# Altium PCB control plate ( mill right).pcbdoc
Units mil, origin at the board's own origin, x right, y up, seen from the top; angles counter-clockwise.
Board outline 8867.98 x 9458.85 mil, 2 copper layers (Top Layer, Bottom Layer); 4 components, 0 nets, 8 pads, 0 vias.
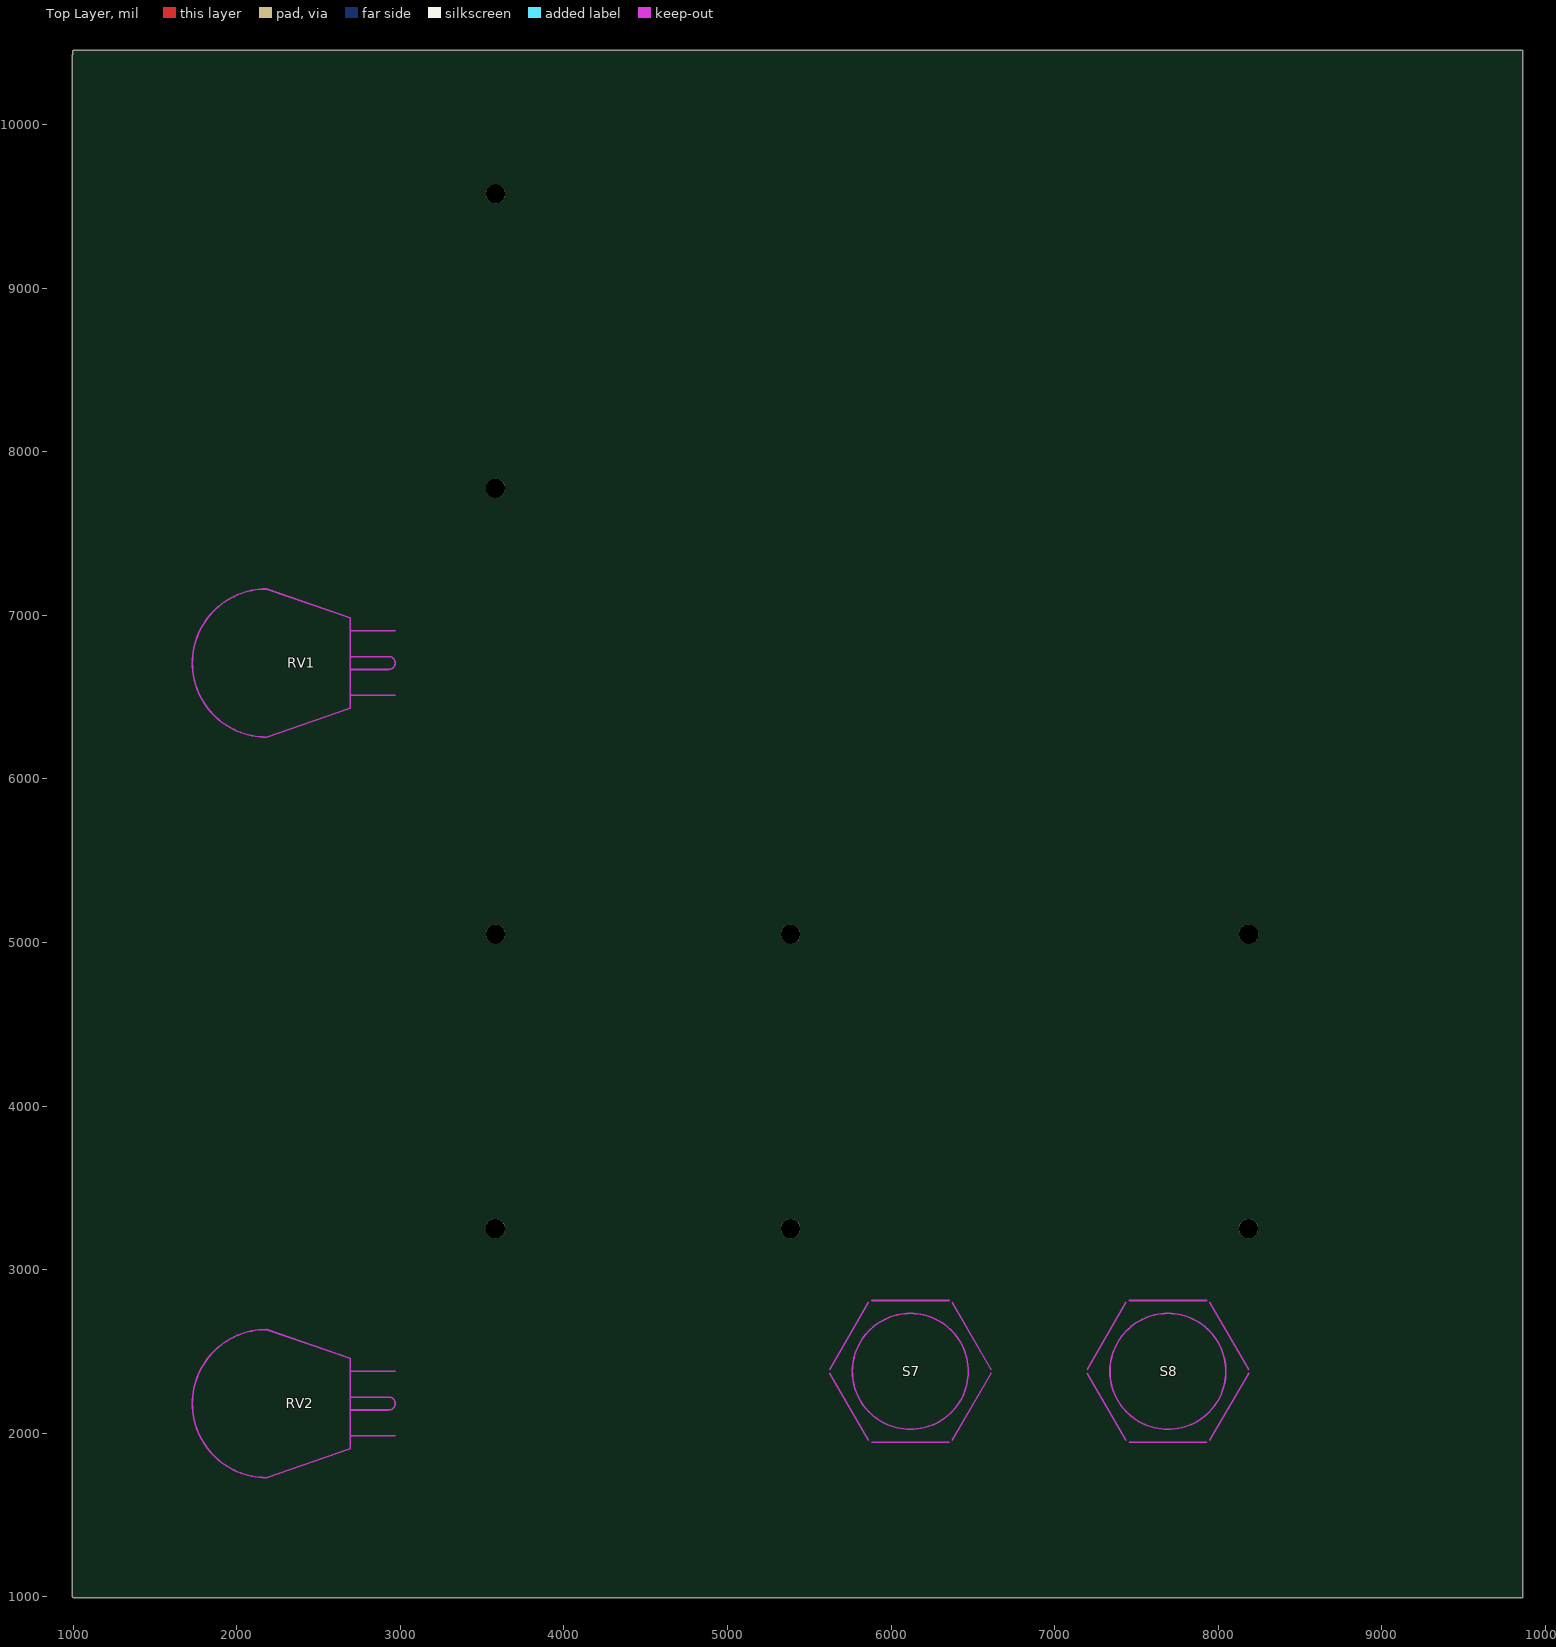
[diagram p0: Top Layer view]
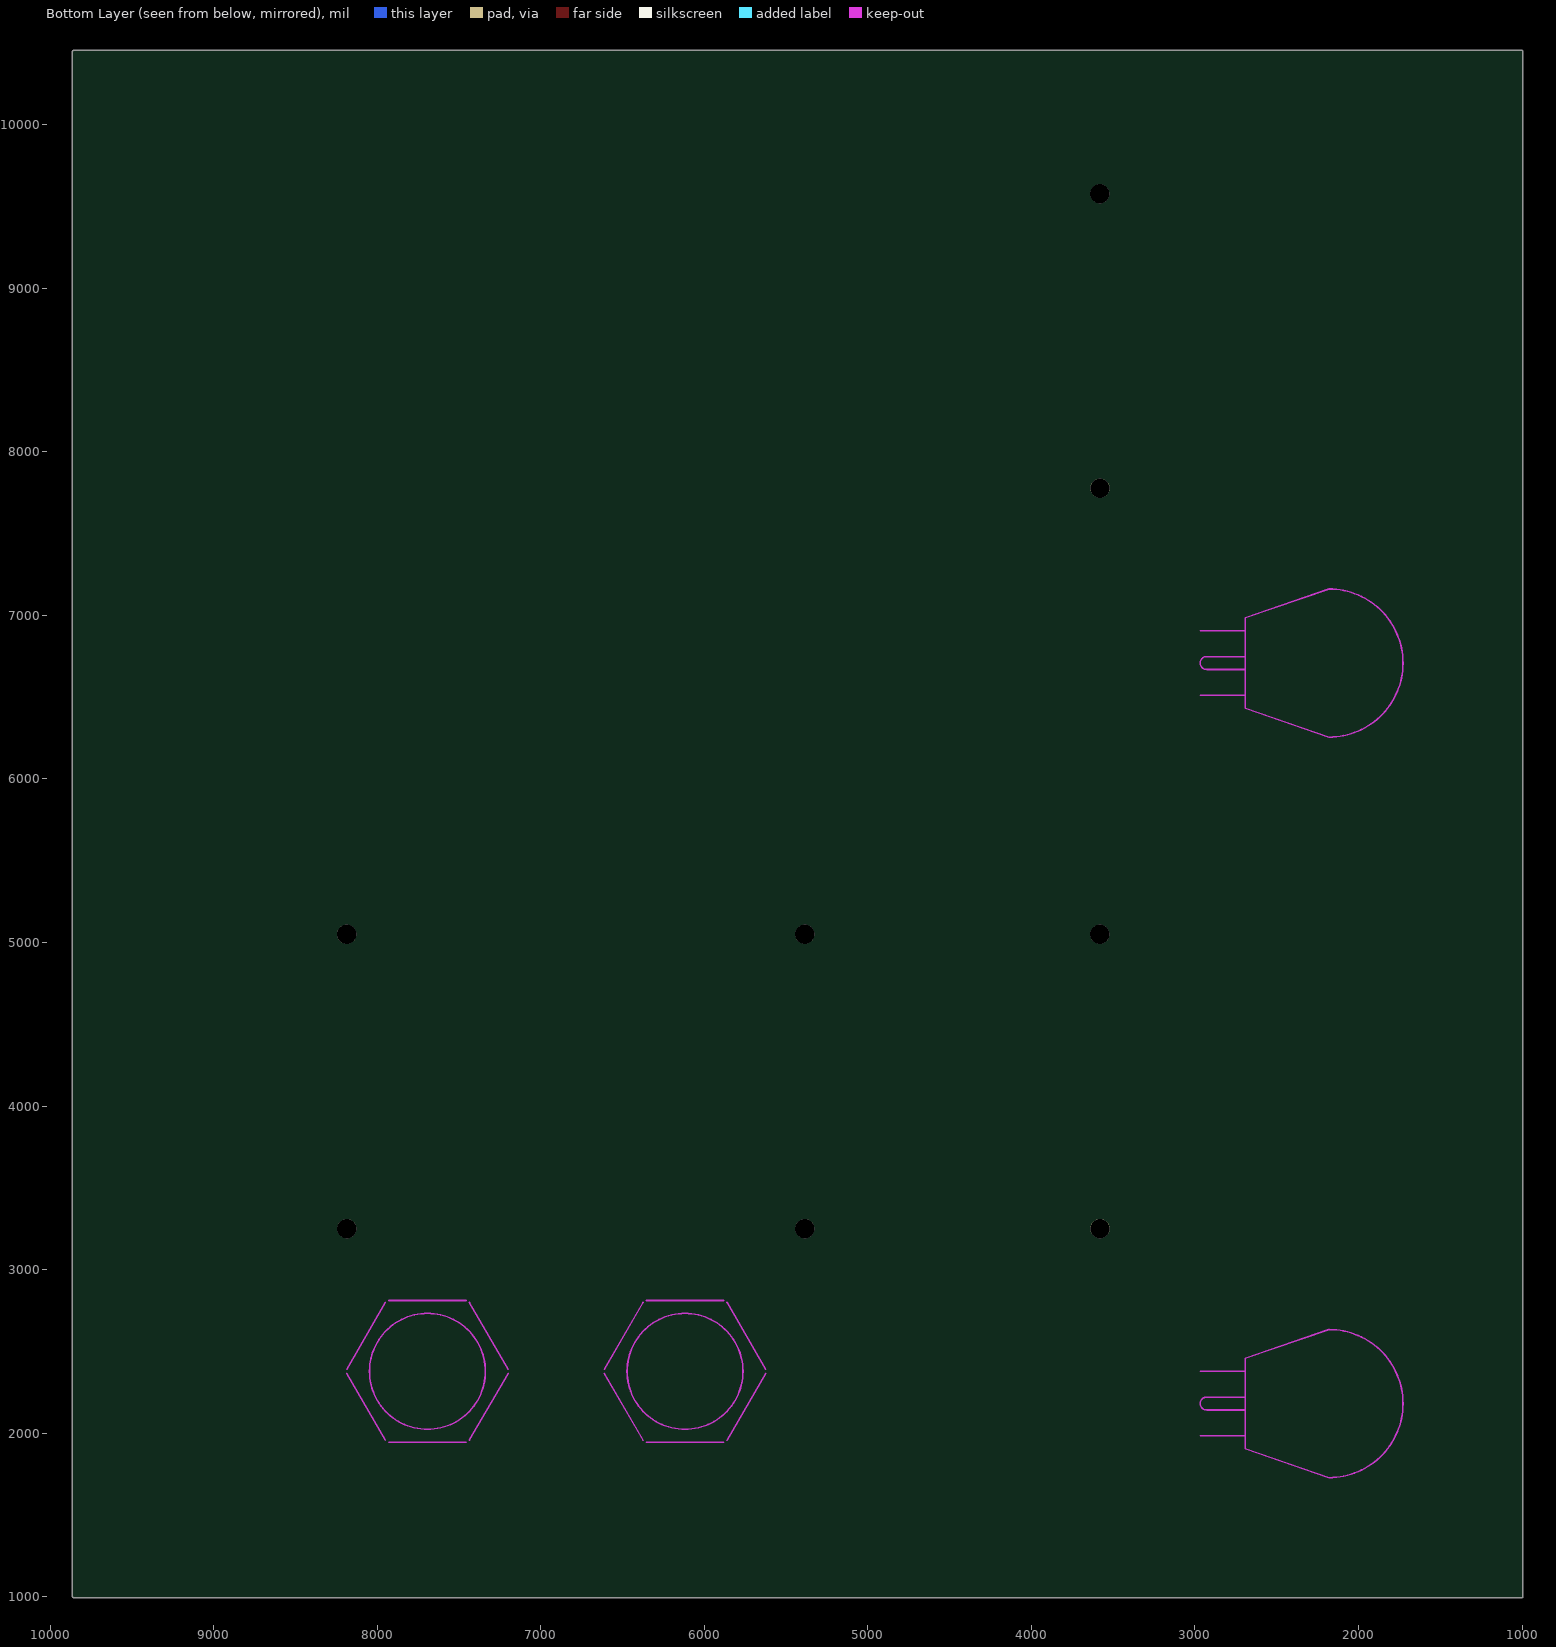
[diagram p1: Bottom Layer view, seen from below]

## Layer stack, top to bottom
Top Layer: signal copper 1.4
Dielectric: dielectric 12.6, FR-4, Dk 4.8
Bottom Layer: signal copper 1.4

## Board outline
994.99,1000 994.99,10425.75 cw(c1000,10425.75) 995.65,10428.24 995.65,10448.82 cw(c1000.66,10448.82) 1000.66,10453.83 9857.95,10453.83 cw(c9857.95,10448.82) 9862.96,10448.82 9862.96,1000 cw(c9857.95,1000) 9857.95,994.99 1000.66,994.99 cw(c1000.66,1000) 1000.33,995 cw(c1000,1000)

## Design rules (kind name [scope] priority, off if disabled: settings)
Clearance [All] p1: gap=10
PolygonConnect [All] p1: connectstyle=Relief reliefconductorwidth=10 reliefentries=4 polygonreliefangle="90 Angle"
RoutingVias [All] p1: holewidth=28 width=50 viastyle="Through Hole" minholewidth=28 minwidth=50 maxholewidth=28 maxwidth=50
SilkscreenOverComponentPads [All] p1: minsilkscreentomaskgap=10
SolderMaskExpansion [All] p1: expansion=4
Width [All] p1: maxlimit=10 minlimit=10 preferedwidth=10
27 further rules are at their usual default settings.

## Components (designator, comment, footprint, x,y, rotation, side; value= is the part's Value field where it differs from the comment)
RV1 "Comment" POTENTIOMETER 2180.78,6708.66 r90 top
RV2 "Comment" POTENTIOMETER 2180.78,2181.1 r90 top
S7 "Comment" "18MM BUTTON" 6117.79,2377.95 r0 top
S8 "Comment" "18MM BUTTON" 7692.59,2377.95 r0 top

## Footprints (in the part's own frame and the unit in brackets; to place one, negate y for a bottom-side part, rotate by r counter-clockwise, add the part's x,y. Pads: shape width x height; smd on the part's side, far side on the other; paste and mask are expansions set on the pad)
"18MM BUTTON" [mil] "BUGLIN MP0045/1D2"
  Keep-Out Layer circle w10: c0,0 r354.33
  Keep-Out Layer lines w10: -493.16,-11.96 -256.94,-421.11 ; -493.16,11.96 -256.94,421.11 ; -236.22,-433.07 236.22,-433.07 ; -236.22,433.07 236.22,433.07 ; 256.94,-421.11 493.16,-11.96 ; 256.94,421.11 493.16,11.96
POTENTIOMETER [mil] "TYCO TW1103KA (Farnell 1502913)"
  Keep-Out Layer lines w10: -39.37,-511.81 -39.37,-708.66 -39.37,-748.03 ccw(c0,-748.03) 39.37,-748.03 39.37,-511.81 ; -196.85,-787.4 -196.85,-511.81 0,-511.81 196.85,-511.81 196.85,-787.4 ; -452.76,0 cw(c0,0) 452.76,0 275.59,-511.81 -275.59,-511.81 -452.76,0

## Free pads (board coordinates)
  round 118.11 hole 118.11 unplated: 0(3581.54,5050.19) 0(3581.54,9577.75) 0(5385.55,5050.19) 0(8186.42,5050.19) 1(5385.55,3250.19) 2(3580.66,3250.19) 2(3580.66,7777.75) 2(8185.55,3250.19)

## Nets (pads, with @x,y where several pads share a name; then routed paths per layer and width w, separated by ;. In a path a pad name is that pad's centre, name@x,y a point inside that pad or via, vN(x,y) a via of type N, cw(c..) or ccw(c..) an arc to the next point about the centre after c; other vN are vias at no path point)

## Silkscreen, mask and mechanical layers (free items; w line width, h text height)
Mechanical 1:
  lines w10: 1000,4390.75 1000,5120.91 ; 1000,9648.47 3362.2,9648.47 3362.2,9140.75 3362.2,8506.74 1000.66,8506.74 1000.66,9648.47 1000.66,10448.82 ; 1000.66,10265.75 1000.66,10448.82 ; 1000.66,10425.75 1000,10425.75 1000,1000 1000.66,1000 9857.95,1000 9857.95,10448.82 1000.66,10448.82 ; 4894.96,5815.75 4894.96,9486.46 8556.37,9486.46 8556.37,5825.04 4894.96,5825.04 ; 5660.66,5120.91 5604.88,5120.91 ; 1000,5120.91 1000,5120.91 ; 1000,5120.91 1000,3979.18 3235.66,3979.18 3362.2,3979.18 3362.2,4890.75 3360.66,4890.75 3360.66,5120.91 1285.66,5120.91 1000,5120.91 ; 5604.88,5120.91 5604.88,3979.18 7967.09,3979.18 7967.09,5120.91 5604.88,5120.91
Mechanical 2:
  lines w10: 9857.95,1000 9857.95,10448.82
Mechanical 3:
  text "DRUM SPEED RPM" at 1393.38,8283.46 h196.85
  text "DRUM SPEED CONTROL" at 999.68,5921.26 h393.7
  text "STIRRER SPEED RPM" at 1393.38,3755.91 h196.85
  text "ELAPSED TIME, HH:MM" at 6019.36,3755.91 h196.85
  text "START" at 5920.94,2968.5 h196.85
  text "STOP" at 7495.74,2968.5 h196.85
  text "PAUSE" at 5920.94,1787.4 h196.85
  text "RESET" at 7495.74,1787.4 h196.85
  text "STIRRER SPEED CONTROL" at 901.25,1393.7 h393.7

## Text inside footprints (layer, text, board x,y; h text height)
RV1: Mechanical 1 "OUT" at 2298.89,6600.39 h78.74 r90; Mechanical 1 "CUT" at 2141.41,6600.39 h78.74 r90; Mechanical 2 "CUT OUT" at 2584.33,6305.12 h118.11 r90
RV2: Mechanical 1 "OUT" at 2298.89,2072.83 h78.74 r90; Mechanical 1 "CUT" at 2141.41,2072.83 h78.74 r90; Mechanical 2 "CUT OUT" at 2584.33,1777.56 h118.11 r90
S7: Mechanical 1 "CUT OUT" at 5861.88,2338.58 h78.74; Mechanical 2 "CUT OUT" at 5861.88,2220.47 h78.74
S8: Mechanical 1 "CUT OUT" at 7436.69,2338.58 h78.74; Mechanical 2 "CUT OUT" at 7436.69,2220.47 h78.74